# Altium PCB PFE_rec.PCBDOC
Units mil, origin at the board's own origin, x right, y up, seen from the top; angles counter-clockwise.
Board outline 2060 x 1625 mil, 2 copper layers (TopLayer, BottomLayer); 10 components, 10 nets, 70 pads, 1 vias.
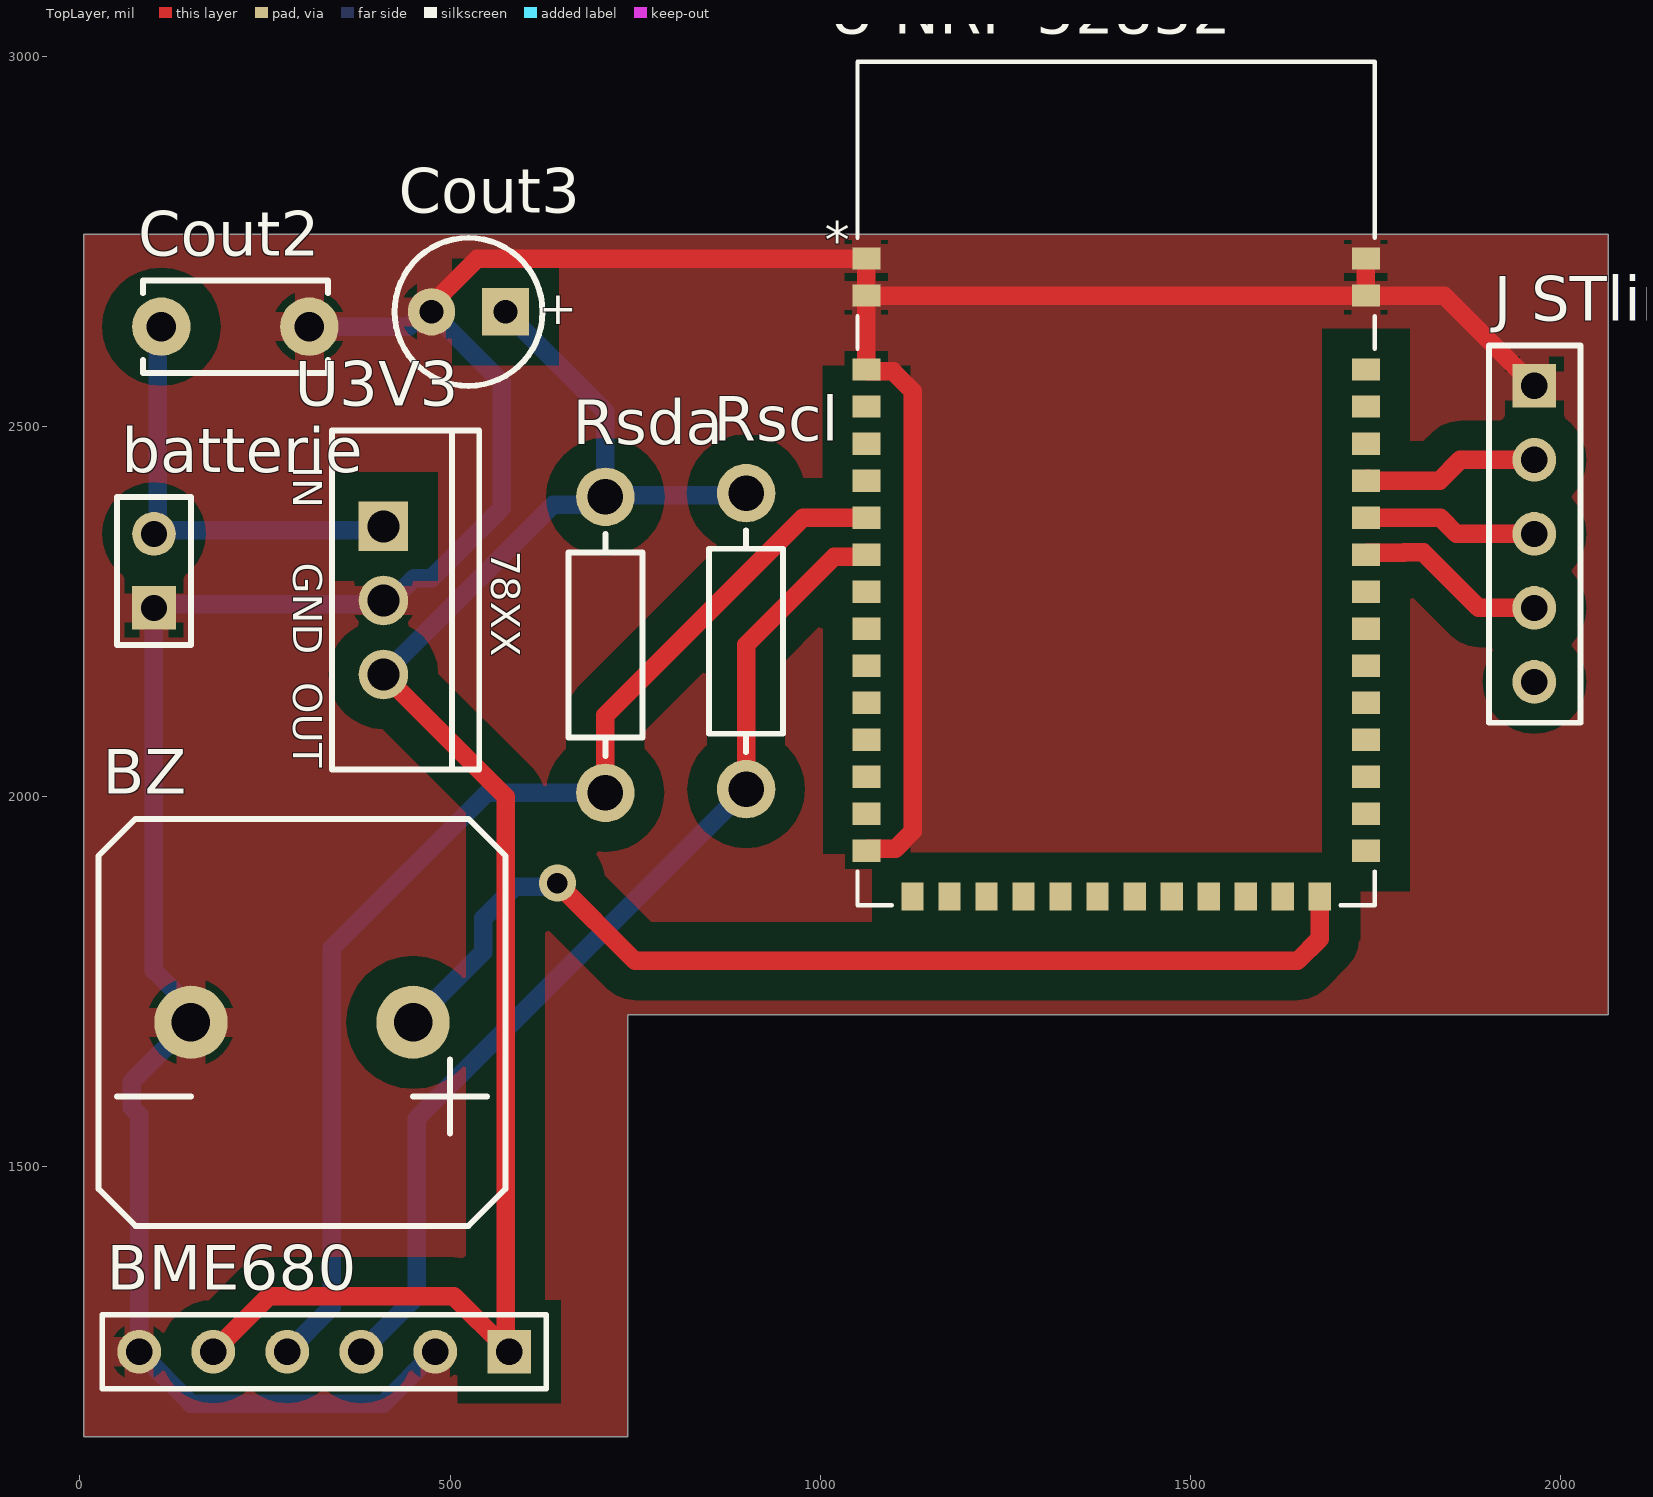
[diagram p0: TopLayer view]
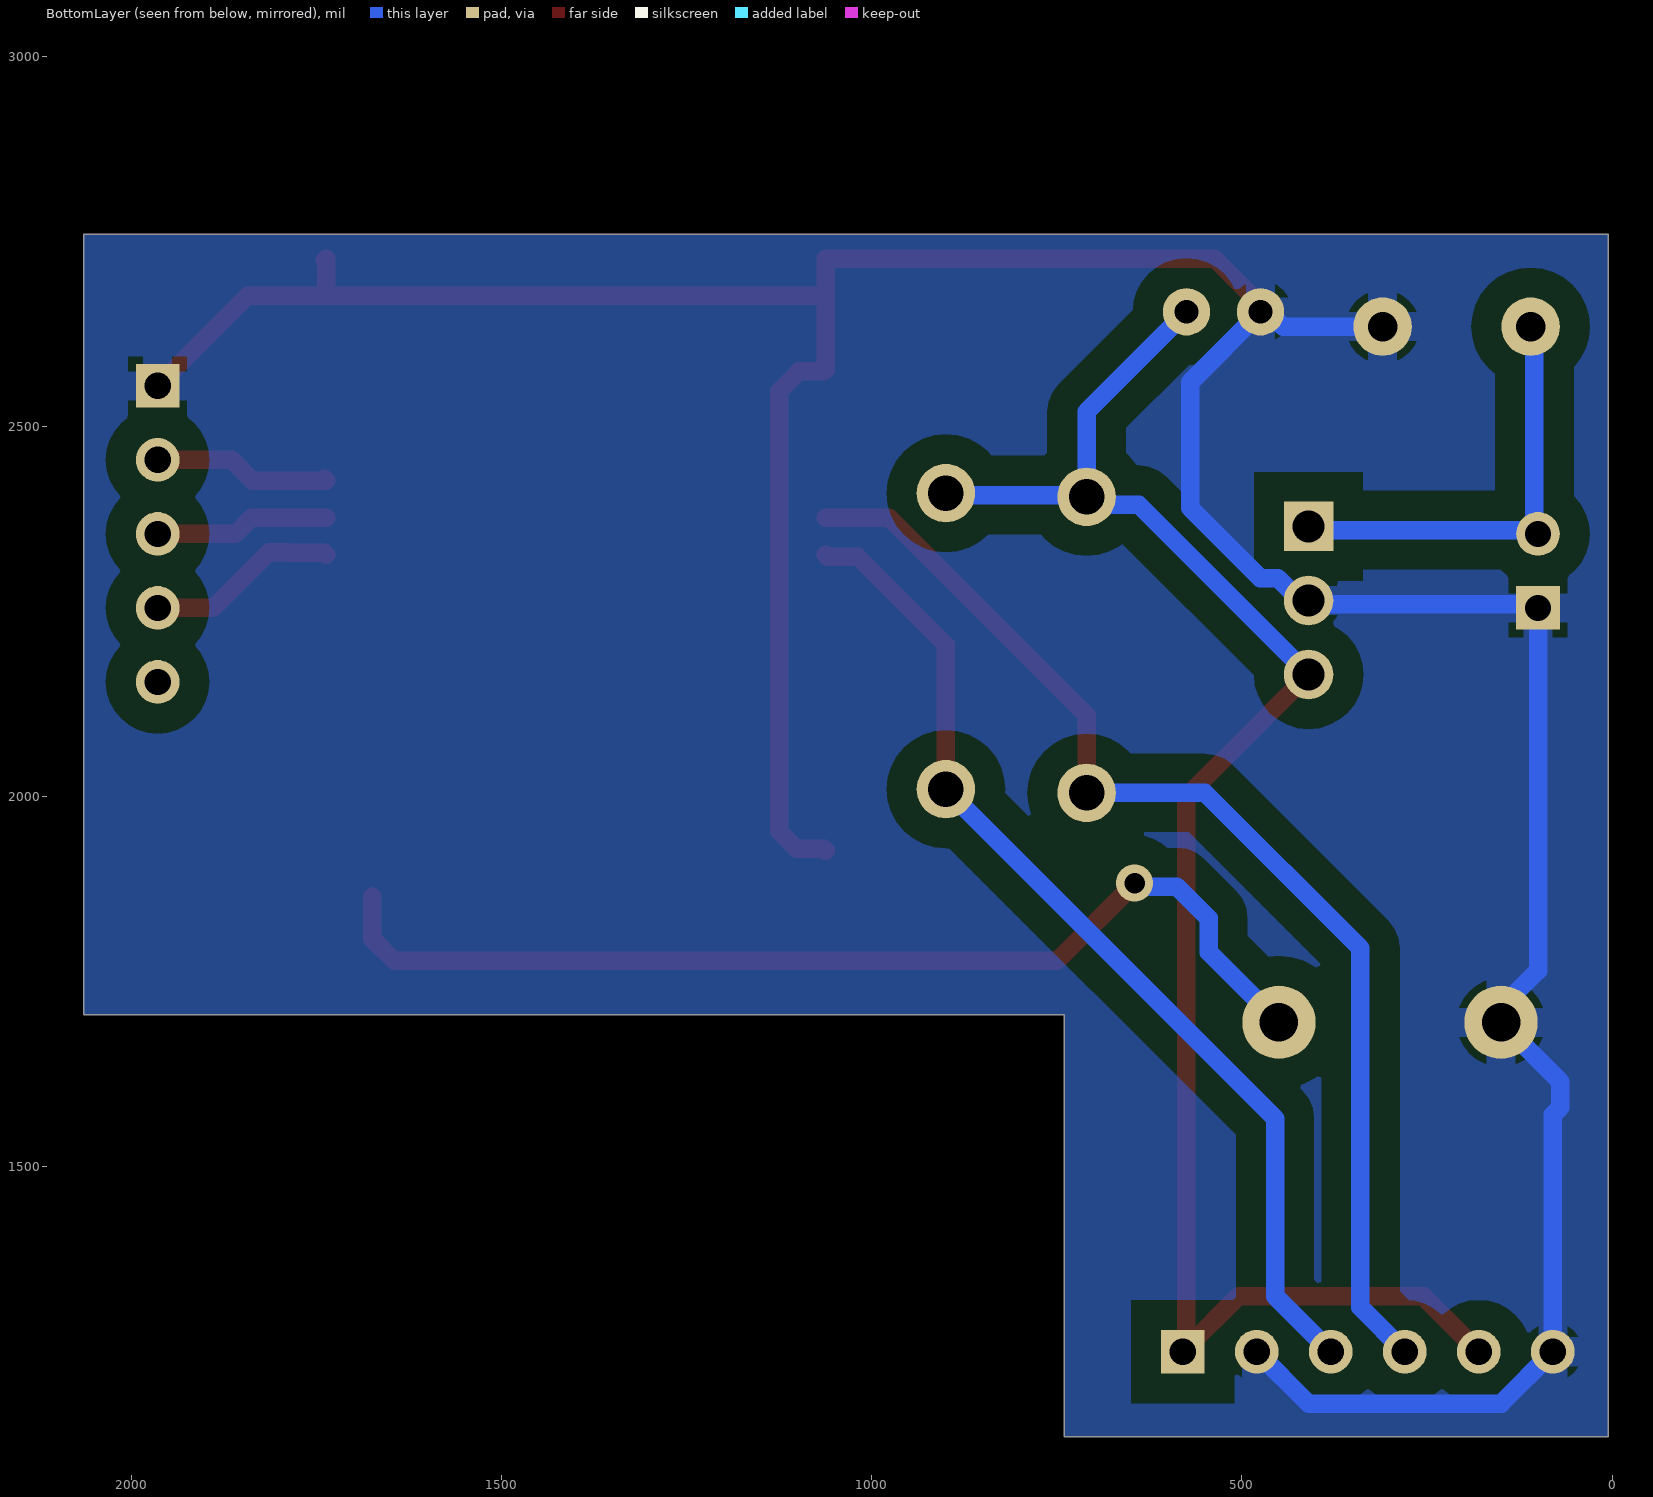
[diagram p1: BottomLayer view, seen from below]
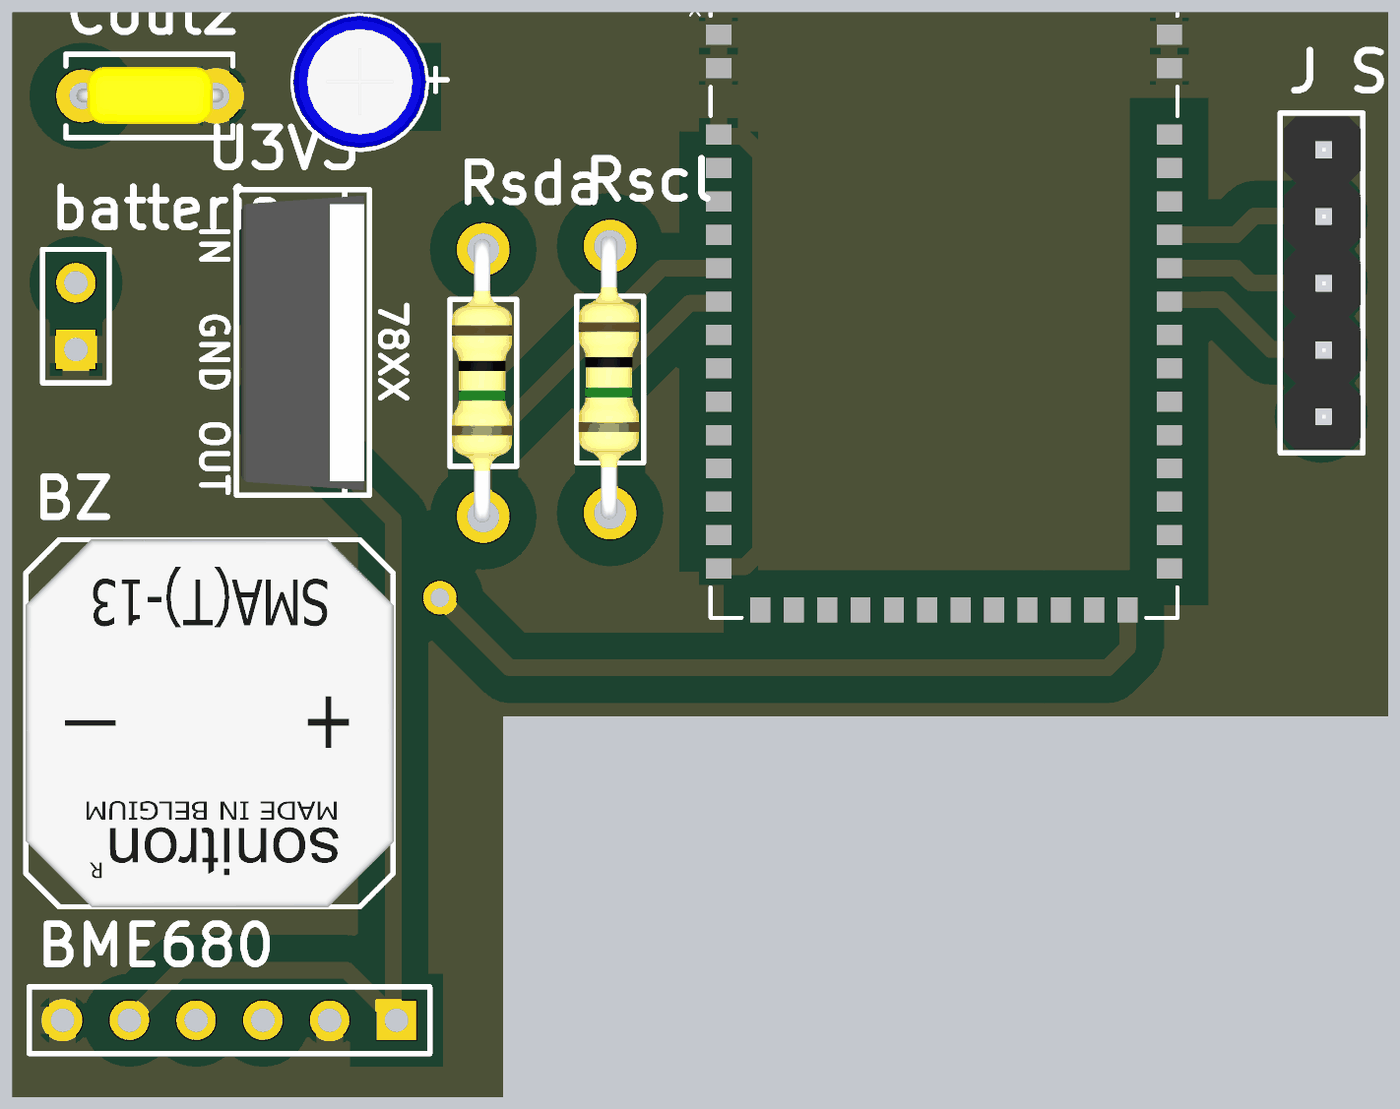
[diagram p2: 3D render of the assembled board from above, using the file's embedded part models]

## Layer stack, top to bottom
TopSolder: solder mask 0.4, Solder Resist, Dk 3.5
TopLayer: signal copper 1.4
Dielectric1: core 12.6, FR-4, Dk 4.8
BottomLayer: signal copper 1.4
BottomSolder: solder mask 0.4, Solder Resist, Dk 3.5

## Board outline
5,1135 5,2760 2065,2760 2065,1705 740,1705 740,1135

## Design rules (kind name [scope] priority, off if disabled: settings)
Clearance PowerPlaneClearance [InNamedPolygon('Bot-GND') Or  InNamedPolygon('Top-GND')] p1: gap=40 ignorepadtopadclearanceinfootprint=FALSE except(0: Arc-Hole Track-Hole SMDPad-Hole THPad-Hole Via-Hole Fill-Hole Poly-Hole Region-Hole Text-Hole)
Clearance [All] p2: gap=20 ignorepadtopadclearanceinfootprint=TRUE except(0: Arc-Hole Track-Hole SMDPad-Hole THPad-Hole Via-Hole Fill-Hole Poly-Hole Region-Hole Text-Hole)
FabricationTestPointUsage TestPointUsage [All] p1: valid=0 allowmultiple=FALSE
FabricationTestpoint Testpoint [All] p1: side=3 testpointundercomponent=TRUE minsize=40 maxsize=100 preferedsize=60 minholesize=20 maxholesize=40 preferedholesize=32 testpointgrid=1 allowsidetop=TRUE allowsidebottom=TRUE usegrid=TRUE gridtolerance=0.01
Height [All] p1: minheight=0 maxheight=2000 prefheight=500
HoleSize [All] p1: absolutevalues=TRUE maxlimit=300 minlimit=11.81 maxpercent=80.000 minpercent=20.000
PlaneClearance [All] p1: clearance=40
PlaneConnect [All] p1: planeconnectstyle=Relief reliefexpansion=19.68 reliefentries=4 reliefconductorwidth=40 reliefairgap=19.68
PolygonConnect [All] p1: connectstyle=Relief reliefconductorwidth=40 reliefentries=4 polygonreliefangle="90 Angle" airgapwidth=10
RoomDefinition PFE_rec [InComponentClass('PFE_rec')] p1: confinementstyle=ConfineIn formatcopy=TRUE lockcomponents=FALSE outline -4000,-6000 -2000,-6000 -2000,-5000 -4000,-5000
RoutingVias [All] p1: holewidth=23.62 width=60 viastyle="Through Hole" minholewidth=23.62 minwidth=60 maxholewidth=23.62 maxwidth=60
SilkToSolderMaskClearance SilkscreenOverComponentPads [IsPad] p1: minsilkscreentomaskgap=10 clearancetoexposedcopper=TRUE
SolderMaskExpansion [All] p1: expansion=2
Width [All] p1: maxlimit=1000 minlimit=20 preferedwidth=40
23 further rules are at their usual default settings.

## Components (designator, comment, footprint, x,y, rotation, side; value= is the part's Value field where it differs from the comment)
batterie "Header 2" HDR1X2 100,2255 r90 top
BME680 "Header 6" HDR1X6 580,1250 r180 top
BZ "BUZZER_SMA13" BUZZER_SMA13 450,1695 r180 top value=SMA13
Cout2 "CONDENSATEUR_CER_RAD_5.08" CONDENSATEUR_CERAMIQUE_RADIAL_5.08 310,2635 r180 top value=100nF
Cout3 "CONDENSATEUR_POL_ELECTROLY_RAD_2.54/5.08" CONDENSATEUR_POLARISE_ELECTROLYTIQUE_RADIAL_2.54/5.08 575,2655 r180 top value=4.7µF/63V
"J STlink" "BARRETTE_5 CONTACTS_1 RANGEE_MALE_DROITE" BARRETTE_5_M_D 1965,2555 r270 top
Rscl "RESISTANCE_AXIALE_1/4W" RESISTANCE_1/4W 900,2410 r270 top value=4.7k
Rsda "RESISTANCE_AXIALE_1/4W" RESISTANCE_1/4W 710,2405 r270 top value=4.7K
U3V3 "REGULATEUR_TO220_78XX" REGULATEUR_TO220_78XX 410,2265 r270 top
"U NRF 52832" "E73-2G4M04S1B" E73-2G4M04S1B_BYT 1400,2423 r0 top

## Footprints (in the part's own frame and the unit in brackets; to place one, negate y for a bottom-side part, rotate by r counter-clockwise, add the part's x,y. Pads: shape width x height; smd on the part's side, far side on the other; paste and mask are expansions set on the pad)
BARRETTE_5_M_D [mm] "BARRETTE 5 CONTACTS ; 1 RANGEE ; DROITE ; MALE ; ESPACEMENT BROCHES = 2.54 mm"
  rect 1.5x1.5 hole 0.9: 1(0,0)
  round 1.5 hole 0.9: 2(2.54,0) 3(5.08,0) 4(7.62,0) 5(10.16,0)
  silkscreen extent -1.38,-1.56 11.56,1.59, body extent -1.25,-1.42 11.45,1.5, height 8.51
BUZZER_SMA13 [mil] "BUZZER SMA13 ; DIMENSIONS :13.96mm x 13.96mm ; ESPACEMENT BROCHES : 7.62mm"
  round 99 hole 52: 1(0,0) 2(300,0)
  silkscreen extent -125,-275 425,275, body extent -126,-276 425,276, height 256
CONDENSATEUR_CERAMIQUE_RADIAL_5.08 [mil] "CONDENSATEUR TRAVERSANT CERAMIQUE RADIAL ; DIMENSIONS : 3.17mm x 5.08mm"
  round 79 hole 40: 1(0,0) 2(200,0)
  silkscreen extent -25,-62 225,63, body extent -11,-43 209,42, height 148
CONDENSATEUR_POLARISE_ELECTROLYTIQUE_RADIAL_2.54/5.08 [mil] "CONDENSATEUR_POLARISE_ELECTROLYTIQUE_RADIAL ; DIAMETRE : 5.08mm ; ESPACEMENT BROCHES : 2.54mm"
  rect 64x64 / inner round 64 / far side round 64 hole 32: 1(0,0)
  round 64 hole 32: 2(100,0)
  silkscreen extent -50,-100 150,100, body extent -50,-101 149,98, height 446
E73-2G4M04S1B_BYT [mil]
  rect 38x30 smd paste+0 mask+0: 1(-337.5,303.9) 2(-337.5,253.9) 3(-337.5,153.9) 4(-337.5,103.9) 5(-337.5,53.9) 6(-337.5,3.9) 7(-337.5,-46.1) 8(-337.5,-96.1) 9(-337.5,-146.1) 10(-337.5,-196.1) 11(-337.5,-246.1) 12(-337.5,-296.1) 13(-337.5,-346.1) 14(-337.5,-396.1) 15(-337.5,-446.1) 16(-337.5,-496.1) 29(337.5,-496.1) 30(337.5,-446.1) 31(337.5,-396.1) 32(337.5,-346.1) 33(337.5,-296.1) 34(337.5,-246.1) 35(337.5,-196.1) 36(337.5,-146.1) 37(337.5,-96.1) 38(337.5,-46.1) 39(337.5,3.9) 40(337.5,53.9) 41(337.5,103.9) 42(337.5,153.9) 43(337.5,253.9) 44(337.5,303.9)
  rect 30x38 smd paste+0 mask+0: 17(-275,-558) 18(-225,-558) 19(-175,-558) 20(-125,-558) 21(-75,-558) 22(-25,-558) 23(25,-558) 24(75,-558) 25(125,-558) 26(175,-558) 27(225,-558) 28(275,-558)
  silkscreen extent -350,-570 350,570
HDR1X2 [mm] "Connector; Header; 2 Position"
  rect 1.5x1.5 hole 0.9: 1(0,0)
  round 1.5 hole 0.9: 2(2.54,0)
  silkscreen extent -1.27,-1.27 3.81,1.27
HDR1X6 [mm] "Connector; Header; 6 Position"
  rect 1.5x1.5 hole 0.9: 1(0,0)
  round 1.5 hole 0.9: 2(2.54,0) 3(5.08,0) 4(7.62,0) 5(10.16,0) 6(12.7,0)
  silkscreen extent -1.27,-1.27 13.97,1.27
REGULATEUR_TO220_78XX [mm] "BOITIER TO220 ; DIMENSIONS : 11.2mm x 4.7mm ; ESPACEMENT BROCHES : 2.54 mm"
  rect 1.7x1.7 hole 1.1: 1(-2.54,0)
  round 1.7 hole 1.1: 2(0,0) 3(2.54,0)
  silkscreen extent -5.83,-1.77 5.8,3.29, body extent -5.61,-1.59 5.61,3.1, height 19.33
RESISTANCE_1/4W [mil] "RESISTANCE 0.25W; DIAMETRE : 2.54mm ; LONGUEUR : 6.35mm ; PAS : 10.16mm"
  round 79 hole 48: 1(0,0) 2(400,0)
  silkscreen extent 50,-50 350,50, body extent -15,-47 409,44, height 116

## Part data
batterie: "Header, 2-Pin", LatestRevisionDate=17-Jul-2002, LatestRevisionNote="Re-released for DXP Platform.", Publisher="Altium Limited"
BME680: "Header, 6-Pin", LatestRevisionDate=17-Jul-2002, LatestRevisionNote="Re-released for DXP Platform.", Publisher="Altium Limited"
BZ: "BUZZER SMA13", Type=BUZZER
Cout2: "CONDENSATEUR TRAVERSANT CERAMIQUE RADIAL 5.08mm", Type=RADIAL_5.08
Cout3: "CONDENSATEUR POLARISE ELECTROLYTIQUE RADIAL 2.54/5.08", Type=POL_RAD_2.54/5.08
"J STlink": "BARRETTE 5 CONTACTS 1 RANGEE MALE DROITE", Type=M_D_5
Rscl Rsda: "RESISTANCE TRAVERSANTE AXIALE 1/4W", Type=1/4W
U3V3: "REGULATEUR DE TENSION POSITIVE 78XX BOITIER TO220", Package=(TO220), Type=LF33CV
"U NRF 52832": "No Description Available", Mfr_Name="Chengdu Ebyte Elec Tech", RefDes=RefDes, Type=Type

## Via types
v1: diameter 50, hole 28, TopLayer to BottomLayer, 1 vias

## Nets (pads, with @x,y where several pads share a name; then routed paths per layer and width w, separated by ;. In a path a pad name is that pad's centre, name@x,y a point inside that pad or via, vN(x,y) a via of type N, cw(c..) or ccw(c..) an arc to the next point about the centre after c; other vN are vias at no path point)
+3V3: BME680.1 BME680.5 Cout3.1 Rscl.1 Rsda.1 U3V3.3 | length 2330.8
  TopLayer w25: BME680.5 255,1325 505,1325 575,1255 575,2000 U3V3.3
  BottomLayer w25: U3V3.3 639.67,2394.67 699.67,2394.67 Rsda.1 ; Cout3.1 710,2520 Rsda.1 ; Rscl.1 897.5,2407.5 712.5,2407.5 Rsda.1
+3V7: batterie.2 Cout2.2 U3V3.1 | length 591.2
  BottomLayer w25: batterie.2 batterie.2@105,2360 ; Cout2.2 105,2630 batterie.2@105,2360 ; U3V3.1 405,2360 batterie.2@105,2360
+5V: "U NRF 52832.17"
Buzzer: "U NRF 52832.28" BZ.1 | length 1442.4
  TopLayer w25: v1(645,1883) 750,1778 1645,1778 1675,1808 1675,1865
  BottomLayer w25: BZ.1 545,1790 545,1835.36 587.86,1878.22 640.22,1878.22 v1(645,1883)
GND: "J STlink.1" "U NRF 52832.1" "U NRF 52832.2" "U NRF 52832.3" "U NRF 52832.16" "U NRF 52832.43" "U NRF 52832.44" batterie.1 BME680.2 BME680.6 BZ.2 Cout2.1 Cout3.2 U3V3.2 | length 5045.4
  TopLayer w25: Cout3.2 475,2664.96 536.94,2726.9 1062.5,2726.9 1062.5,2676.9 ; 1062.5,1926.9 1065,1929.4 1101.4,1929.4 1125,1953 1125,2548 1098.6,2574.4 1065,2574.4 ; 1062.5,2576.9 1062.5,2676.9 ; 1739.45,2724.95 1737.5,2726.9 1737.5,2676.9 ; 1961.1,2555 1963.05,2556.95 ; 1965,2555 1963.05,2556.95 ; 1062.5,2676.9 1737.5,2676.9 ; 1737.5,2676.9 1843.1,2676.9 1963.05,2556.95
  BottomLayer w20: BZ.2 BZ.2@150,1707.43
  BottomLayer w25: BZ.2 70,1615 70,1580 80,1570 BME680.6 150,1180 410,1180 BME680.2 ; BZ.2@150,1707.43 150,1715.02 100,1765.02 batterie.1 105,2260 405,2260 U3V3.2 421.35,2265 451.35,2295 475,2295 570,2390 570,2560 Cout3.2 464.45,2655 444.45,2635 Cout2.1
RST: "J STlink.4" "U NRF 52832.37" | length 259.9
  TopLayer w25: 1737.5,2326.9 1740,2329.4 1788.4,2329.4 1789,2330 1815,2330 1890,2255 1965,2255
SCL: "U NRF 52832.8" BME680.3 Rscl.2 | length 1390.5
  TopLayer w25: Rscl.2@905,2015 Rscl.2 900,2205 1019.4,2324.4 1060,2324.4 1062.5,2326.9
  BottomLayer w25: BME680.3 455,1325 455,1565 Rscl.2
SDA: "U NRF 52832.7" BME680.4 Rsda.2 | length 1609
  TopLayer w25: Rsda.2@720,2015 Rsda.2 710,2110 976.9,2376.9 1062.5,2376.9
  BottomLayer w25: BME680.4 340,1310 340,1795 550,2005 Rsda.2
SWCLK: "J STlink.3" "U NRF 52832.38" | length 227.4
  TopLayer w25: 1737.5,2376.9 1838.1,2376.9 1860,2355 1955.78,2355
SWDIO: "J STlink.2" "U NRF 52832.39" | length 242.7
  TopLayer w25: 1740,2429.4 1737.5,2426.9 1836.9,2426.9 1865,2455 1965,2455
pads on no net: "J STlink.5" "U NRF 52832.4" "U NRF 52832.5" "U NRF 52832.6" "U NRF 52832.9" "U NRF 52832.10" "U NRF 52832.11" "U NRF 52832.12" "U NRF 52832.13" "U NRF 52832.14" "U NRF 52832.15" "U NRF 52832.18" "U NRF 52832.19" "U NRF 52832.20" "U NRF 52832.21" "U NRF 52832.22" "U NRF 52832.23" "U NRF 52832.24" "U NRF 52832.25" "U NRF 52832.26" "U NRF 52832.27" "U NRF 52832.29" "U NRF 52832.30" "U NRF 52832.31" "U NRF 52832.32" "U NRF 52832.33" "U NRF 52832.34" "U NRF 52832.35" "U NRF 52832.36" "U NRF 52832.40" "U NRF 52832.41" "U NRF 52832.42"

## Polygon pours and split planes (outlines as drawn)
GND on BottomLayer "Bot-GND" (solid, pour order 0): 5,2760 5,1135 740,1135 740,1705 2065,1705 2065,2760
GND on TopLayer "Bot-GND" (solid, pour order 2): 5,2760 5,1135 740,1135 740,1705 2065,1705 2065,2760

## Other copper
TopLayer:

## Silkscreen, mask and mechanical layers (free items; w line width, h text height)
Mechanical1:
  lines w20: 5,1135 740,1135 740,1705 1847.5,1705 2065,1705 2065,1840 2065,2760 5,2760 5,1135

## Text inside footprints (layer, text, board x,y; h text height)
Cout3: TopOverlay "+" at 671.85,2676.65 h45 r180
U3V3: TopOverlay "IN" at 287.95,2446.1 h39.37 r270; TopOverlay "GND" at 287.95,2316.18 h39.37 r270; TopOverlay "OUT" at 287.95,2154.76 h39.37 r270; TopOverlay "78XX" at 555.67,2331.93 h39.37 r270
"U NRF 52832": TopOverlay "*" at 1006,2726.9 h50; Mechanical13 "*" at 1069,2726.9 h50